# EAGLE board trans_vi_char (EAGLE 6.5.0)
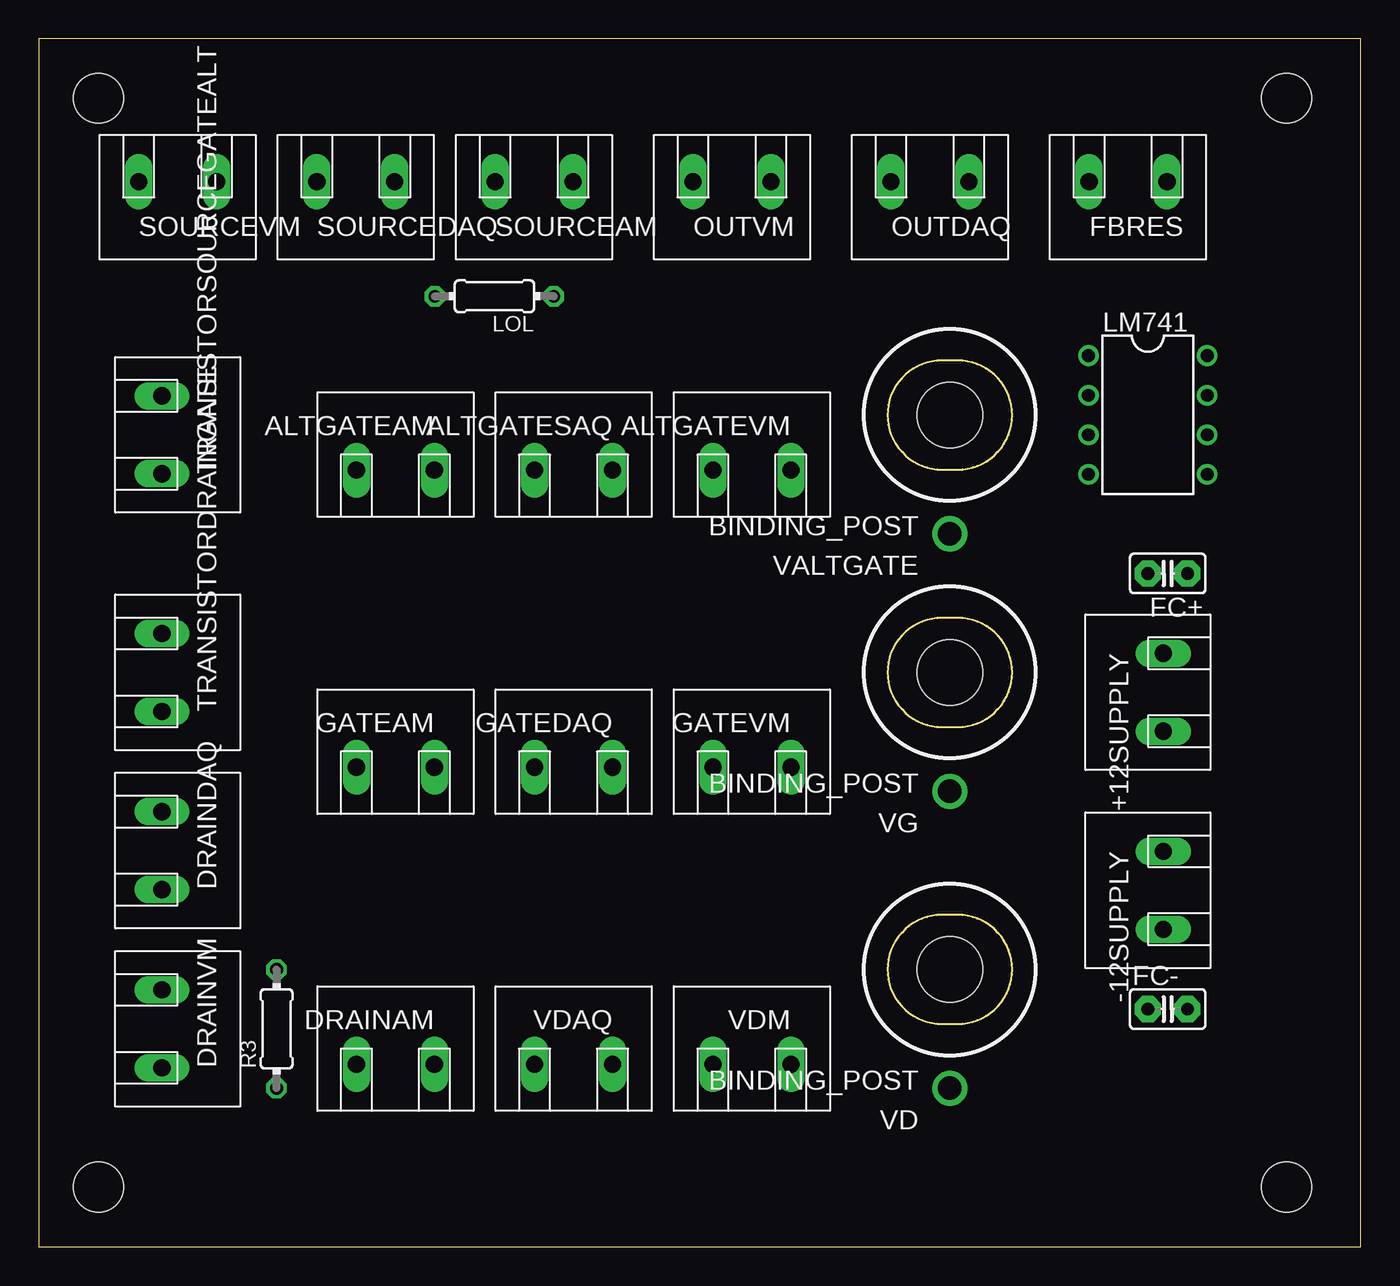
[diagram p0: board, top side]
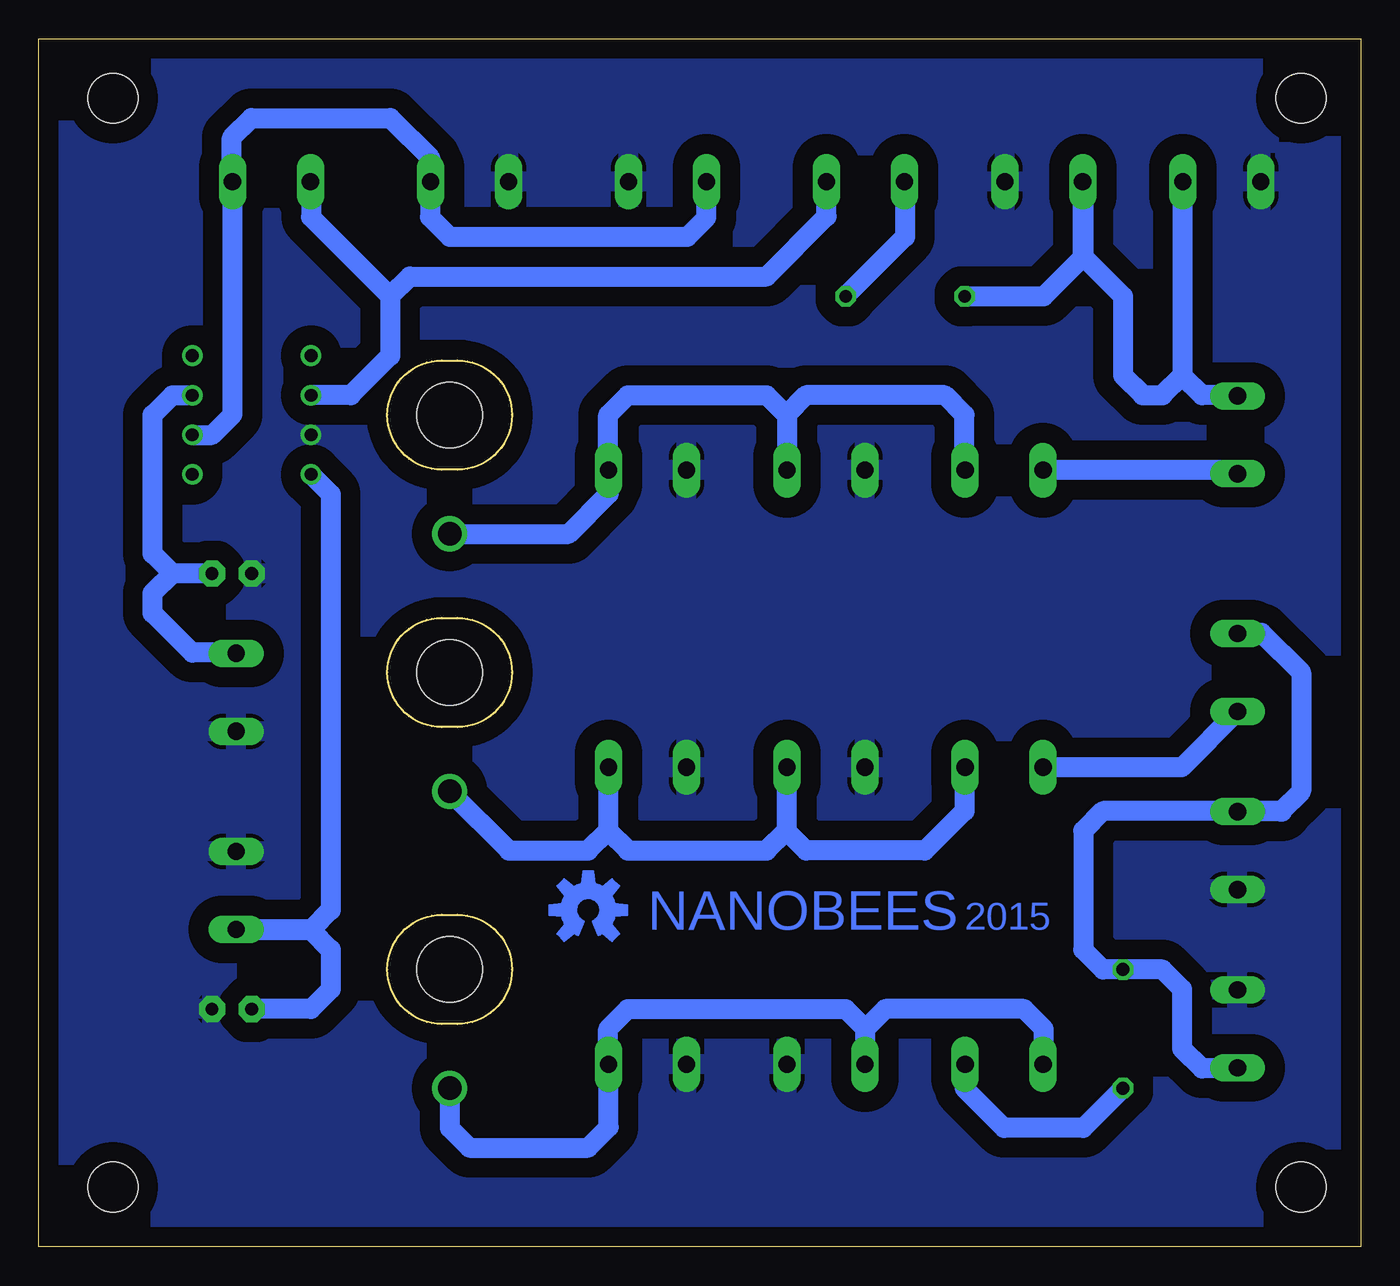
[diagram p1: board, bottom side, seen from below]

Size 84.76 x 77.46 mm. Coordinates in mm from the lower left corner, seen from the top.
Outline: 0,0 84.76,0 84.76,77.46 0,77.46 0,0
Copper layers (1*16): Top 0.035mm / dielectric 1.5mm / Bottom 0.035mm
Design rules "default": minimum track width 10mil, minimum drill 24mil, track to track 8mil, track to pad 8mil, pad to pad 8mil, via to via 8mil, smd to smd 8mil, copper to edge 40mil, drill to drill 8mil, minimum pad ring 10mil, minimum via ring 8mil, stop-mask expansion 4mil, vias tented up to drill 0mil, thermal gap 10mil
Holes 3.2 mm at 3.81,73.66 80.01,73.66 80.01,3.81 3.81,3.81
Holes 4.2 mm at 58.42,53.34 58.42,36.83 58.42,17.78

## Footprints (pad centres in the part's own frame; a part is rotated, then mirrored left to right if it is on the bottom)
M02-NANOBEES = drill 1.1 pad 1.778 long: 1 -2.5,1; 2 2.5,1
C025-025X050 = drill 0.813 pad 1.676 octagon: 1 -1.27,0; 2 1.27,0
DIL08 = drill 0.813 pad 1.27: 1 -3.81,-3.81; 2 -1.27,-3.81; 3 1.27,-3.81; 4 3.81,-3.81; 5 3.81,3.81; 6 1.27,3.81; 7 -1.27,3.81; 8 -3.81,3.81
0204/7 = drill 0.813 octagon: 1 -3.81,0; 2 3.81,0
BINDING_POST = drill 1.5: P$1 0,7.62

## Placement (x,y rotation side)
+12SUPPLY  M02-NANOBEES  [M02-NANOBEES]  71.12,35.56 270 top
-12SUPPLY  M02-NANOBEES  [M02-NANOBEES]  71.12,22.86 270 top
ALTGATEAM  M02-NANOBEES  [M02-NANOBEES]  22.86,50.8 180 top
ALTGATESAQ  M02-NANOBEES  [M02-NANOBEES]  34.29,50.8 180 top
ALTGATEVM  M02-NANOBEES  [M02-NANOBEES]  45.72,50.8 180 top
DRAINAM  M02-NANOBEES  [M02-NANOBEES]  22.86,12.7 180 top
DRAINDAQ  M02-NANOBEES  [M02-NANOBEES]  8.89,25.4 90 top
DRAINVM  M02-NANOBEES  [M02-NANOBEES]  8.89,13.97 90 top
FBRES  M02-NANOBEES  [M02-NANOBEES]  69.85,67.31 0 top
FC+  [C025-025X050]  72.39,43.18 180 top
FC-  [C025-025X050]  72.39,15.24 0 top
FRAME1  FRAME-LETTER  [CREATIVE_COMMONS]  20.32,-7.62 0 top  (outside the outline)
GATEAM  M02-NANOBEES  [M02-NANOBEES]  22.86,31.75 180 top
GATEDAQ  M02-NANOBEES  [M02-NANOBEES]  34.29,31.75 180 top
GATEVM  M02-NANOBEES  [M02-NANOBEES]  45.72,31.75 180 top
LM741  LM741P  [DIL08]  71.12,53.34 270 top
LOGO1  OSHW-LOGOM  [OSHW-LOGO-M]  49.53,21.59 0 top
LOL  [0204/7]  29.21,60.96 180 top
OUTDAQ  M02-NANOBEES  [M02-NANOBEES]  57.15,67.31 0 top
OUTVM  M02-NANOBEES  [M02-NANOBEES]  44.45,67.31 0 top
R3  [0204/7]  15.24,13.97 90 top
SOURCEAM  M02-NANOBEES  [M02-NANOBEES]  31.75,67.31 0 top
SOURCEDAQ  M02-NANOBEES  [M02-NANOBEES]  20.32,67.31 0 top
SOURCEVM  M02-NANOBEES  [M02-NANOBEES]  8.89,67.31 0 top
TRANSISTORDRAINGATE  M02-NANOBEES  [M02-NANOBEES]  8.89,36.83 90 top
TRANSISTORSOURCEGATEALT  M02-NANOBEES  [M02-NANOBEES]  8.89,52.07 90 top
VALTGATE  BINDING_POST  [BINDING_POST]  58.42,53.34 180 top
VD  BINDING_POST  [BINDING_POST]  58.42,17.78 180 top
VDAQ  M02-NANOBEES  [M02-NANOBEES]  34.29,12.7 180 top
VDM  M02-NANOBEES  [M02-NANOBEES]  45.72,12.7 180 top
VG  BINDING_POST  [BINDING_POST]  58.42,36.83 180 top

## Library data of the parts
+12SUPPLY -12SUPPLY ALTGATEAM ALTGATESAQ ALTGATEVM DRAINAM DRAINDAQ DRAINVM FBRES GATEAM GATEDAQ GATEVM OUTDAQ OUTVM SOURCEAM SOURCEDAQ SOURCEVM TRANSISTORDRAINGATE TRANSISTORSOURCEGATEALT VALTGATE VD VDAQ VDM VG = SparkFun-Connectors
FC+ FC- = adafruit
FRAME1 LOGO1 = SparkFun-Aesthetics
LM741 = linear
LOL R3 = resistor

## Nets
+12V: +12SUPPLY.1 FC+.1 LM741.7
-12V: -12SUPPLY.2 FC-.1 LM741.4
GND: +12SUPPLY.2 -12SUPPLY.1 ALTGATESAQ.2 ALTGATEVM.2 DRAINDAQ.1 DRAINVM.2 FC+.2 FC-.2 GATEDAQ.2 GATEVM.2 LM741.3 OUTDAQ.1 OUTVM.2 SOURCEDAQ.2 SOURCEVM.1 VDAQ.1 VDM.2
N$1: FBRES.2 LM741.6 OUTDAQ.2 OUTVM.1
N$2: FBRES.1 LM741.2 SOURCEAM.2
N$3: DRAINDAQ.2 DRAINVM.1 R3.2 TRANSISTORDRAINGATE.2
N$4: LOL.2 SOURCEDAQ.1 SOURCEVM.2 TRANSISTORSOURCEGATEALT.2
N$5: DRAINAM.1 R3.1
N$6: ALTGATEAM.2 TRANSISTORSOURCEGATEALT.1
N$7: GATEAM.2 TRANSISTORDRAINGATE.1
N$8: GATEAM.1 GATEDAQ.1 GATEVM.1 VG.P$1
N$9: DRAINAM.2 VD.P$1 VDAQ.2 VDM.1
N$10: ALTGATEAM.1 ALTGATESAQ.1 ALTGATEVM.1 VALTGATE.P$1
N$11: LOL.1 SOURCEAM.1

## Tracks (layer width: path | path; a pad name or v marks a point on that pad's centre or on a via)
+12V
  Bottom 1.27: +12SUPPLY.1 72.16,38.1 74.93,38.1 77.47,40.64 77.47,41.91 76.2,43.18 | FC+.1 76.2,43.18 | 76.2,43.18 77.47,44.45 77.47,53.34 76.2,54.61 LM741.7
-12V
  Bottom 1.27: LM741.4 66.04,48.26 66.04,21.59 67.27,20.36 -12SUPPLY.2 72.08,20.32 67.31,20.32 66.04,19.05 66.04,16.51 67.31,15.24 FC-.1
GND
  pour Bottom (isolate 1.27): 0,77.47 0,0 85.09,0 85.09,77.47
N$1
  Bottom 1.27: LM741.6 73.66,52.07 72.35,53.38 FBRES.2 72.39,68.35 72.39,71.12 71.12,72.39 62.23,72.39 59.65,69.81 OUTDAQ.2 59.69,68.27 59.69,66.04 58.42,64.77 43.18,64.77 41.95,66 OUTVM.1
N$2
  Bottom 1.27: FBRES.1 67.31,68.27 67.31,66.04 62.23,60.96 | 62.23,60.96 62.23,57.15 64.77,54.61 LM741.2 | 62.23,60.96 60.96,62.23 38.1,62.23 34.25,66.08 SOURCEAM.2
N$3
  Bottom 1.27: TRANSISTORDRAINGATE.2 7.85,39.37 6.35,39.37 3.81,36.83 3.81,29.21 5.12,27.9 | 5.12,27.9 DRAINDAQ.2 | 7.85,11.43 DRAINVM.1 7.93,11.43 10.16,11.43 11.43,12.7 11.43,16.51 12.7,17.78 R3.2 16.51,17.78 17.78,19.05 17.78,26.67 16.51,27.94 5.08,27.94 5.04,27.9 5.12,27.9
N$4
  Bottom 1.27: TRANSISTORSOURCEGATEALT.2 7.93,54.61 10.16,54.61 11.39,55.84 11.39,55.88 | 11.39,55.88 SOURCEVM.2 | LOL.2 20.32,60.96 17.82,63.46 SOURCEDAQ.1 17.78,68.27 17.78,63.5 15.24,60.96 15.24,55.88 13.97,54.61 12.7,54.61 11.43,55.88 11.39,55.88
N$5
  Bottom 1.27: R3.1 17.78,7.62 22.86,7.62 25.4,10.16 25.36,10.2 DRAINAM.1
N$6
  Bottom 1.27: TRANSISTORSOURCEGATEALT.1 8.12,49.8 ALTGATEAM.2
N$7
  Bottom 1.27: TRANSISTORDRAINGATE.1 11.47,30.75 GATEAM.2
N$8
  Bottom 1.27: GATEAM.1 25.4,30.71 25.4,27.94 27.94,25.4 35.56,25.4 36.79,26.63 36.79,26.67 | 36.79,26.67 GATEDAQ.1 | VG.P$1 54.61,25.4 49.53,25.4 48.26,26.67 | 48.26,26.67 48.22,26.71 GATEVM.1 48.26,30.71 48.26,26.67 | 48.26,26.67 46.99,25.4 38.1,25.4 36.83,26.67 36.79,26.67
N$9
  Bottom 1.27: DRAINAM.2 20.32,11.74 20.32,13.97 21.59,15.24 30.48,15.24 31.75,13.97 | 31.75,13.97 31.79,13.93 VDAQ.2 | 31.75,13.97 33.02,15.24 46.99,15.24 48.26,13.97 48.26,11.74 VDM.1 48.22,7.66 49.53,6.35 57.15,6.35 58.42,7.62 VD.P$1
N$10
  Bottom 1.27: ALTGATEAM.1 25.4,49.84 25.4,53.34 26.67,54.61 35.56,54.61 36.79,53.38 36.79,53.34 | 36.79,53.34 ALTGATESAQ.1 | 36.79,53.34 36.83,53.34 38.1,54.61 46.99,54.61 48.26,53.34 48.26,49.84 ALTGATEVM.1 48.22,48.3 50.8,45.72 VALTGATE.P$1
N$11
  Bottom 1.27: SOURCEAM.1 29.21,68.27 29.21,64.77 LOL.1

## Text on the board
Bottom: 2015 | NANOBEES